# Altium PCB PCB recrea.PcbDoc
Units mm, origin at the board's own origin, x right, y up, seen from the top; angles counter-clockwise.
Board outline 98.78 x 23.62 mm, 2 copper layers (Top Layer, Bottom Layer); 52 components, 41 nets, 192 pads, 28 vias.
Unrouted connection lines stored in the file: 4.
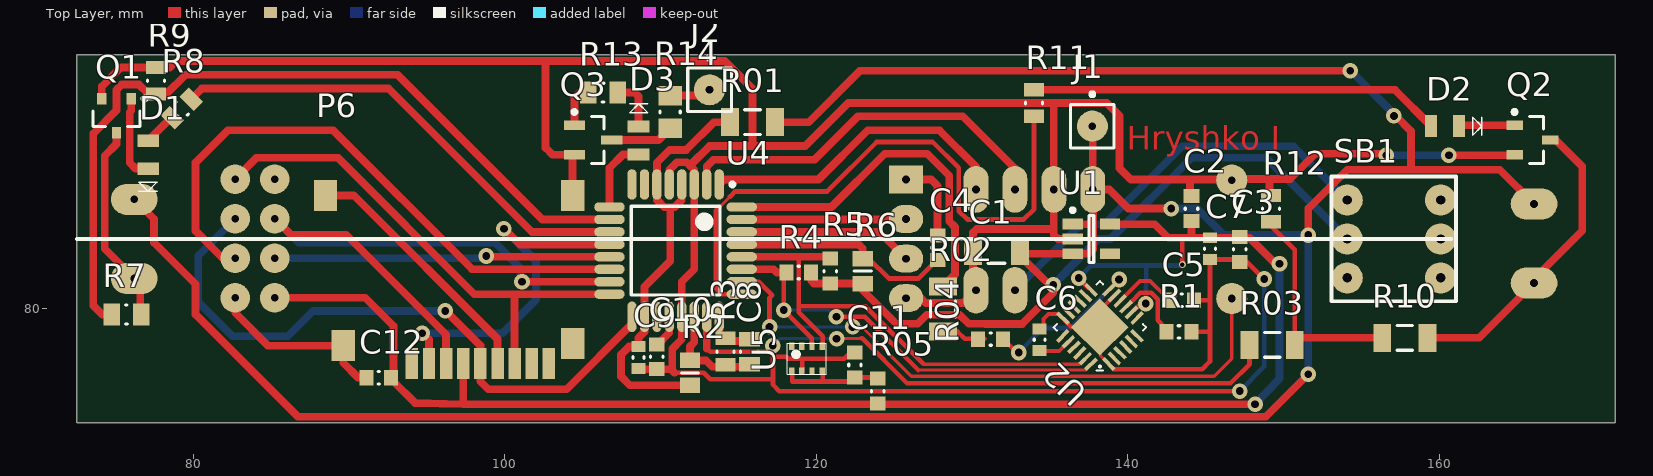
[diagram p0: Top Layer view]
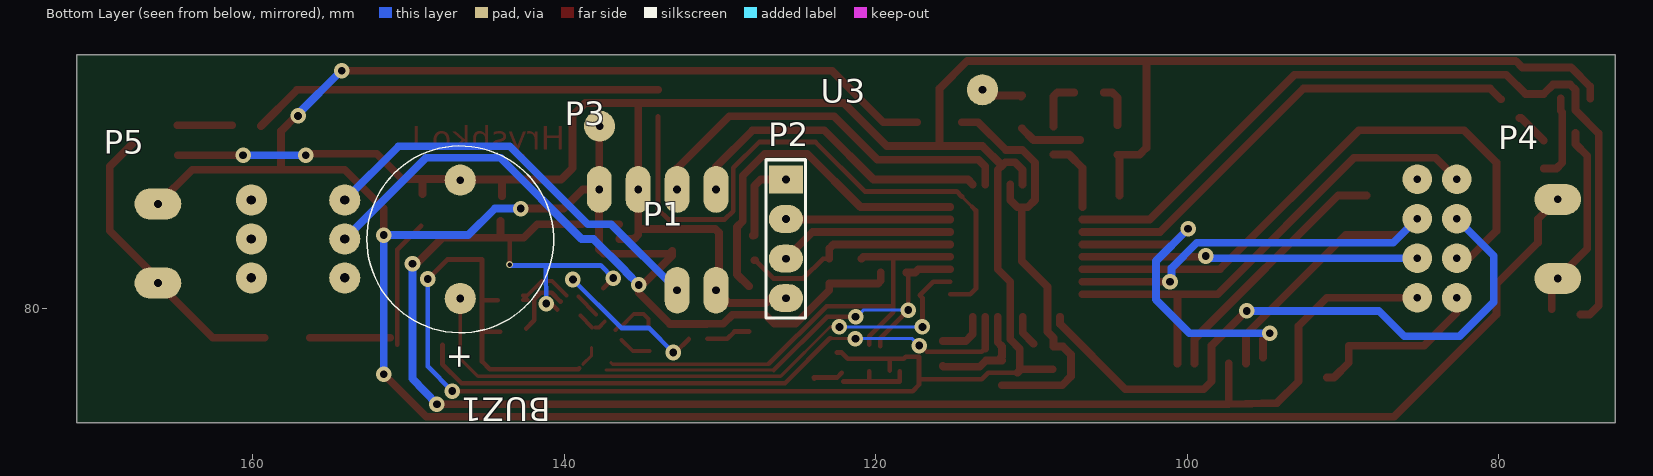
[diagram p1: Bottom Layer view, seen from below]
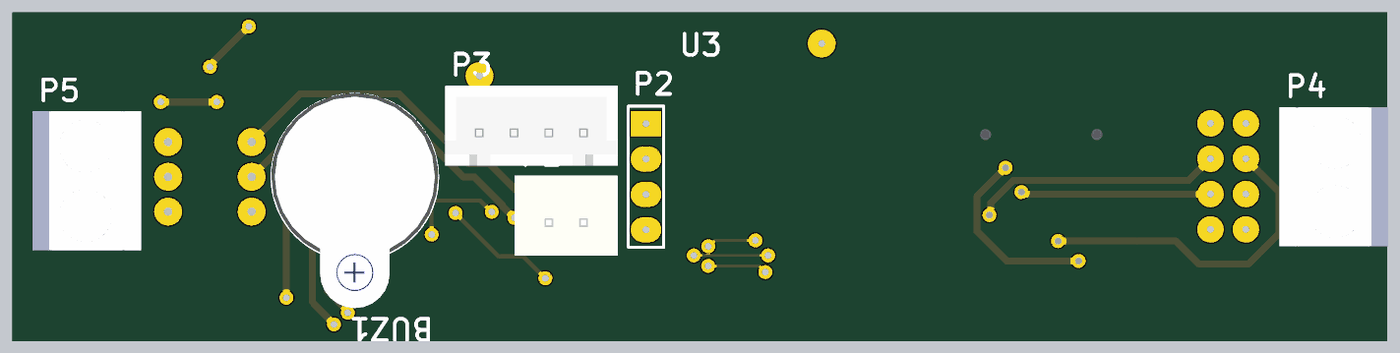
[diagram p2: 3D render of the assembled board from below, using the file's embedded part models]

## Layer stack, top to bottom
Top Layer: signal copper 0.0356
Dielectric 1: dielectric 0.32, FR-4, Dk 4.8
Bottom Layer: signal copper 0.0356

## Board outline
72.517,72.644 171.3,72.644 171.3,96.266 72.517,96.266

## Design rules (kind name [scope] priority, off if disabled: settings)
Clearance [All] p1: gap=0.15 ignorepadtopadclearanceinfootprint=TRUE except(0: Arc-SMDPad Arc-THPad Arc-Via Arc-Fill Arc-Poly Arc-Region Arc-Text Arc-Hole Track-SMDPad Track-THPad Track-Via Track-Fill Track-Poly Track-Region Track-Text Track-Hole)
ComponentClearance [All] p1: gap=0.5 collisioncheckmode=3 verticalgap=0 showdistances=TRUE
HoleSize [All] p1: absolutevalues=TRUE maxlimit=2.54 minlimit=0.3 maxpercent=80.000 minpercent=20.000
PolygonConnect [All] p1: connectstyle=Relief reliefconductorwidth=0.254 reliefentries=4 polygonreliefangle="90 Angle" airgapwidth=0.254
RoutingVias [All] p1: holewidth=0.711 width=1.27 viastyle="Through Hole" minholewidth=0.3 minwidth=0.46 maxholewidth=0.711 maxwidth=1.27
ShortCircuit [All] p1: allowed=TRUE
SolderMaskExpansion [All] p1: expansion=0.102
Width [All] p1: maxlimit=0.7 minlimit=0.2 preferedwidth=0.5
27 further rules are at their usual default settings.

## Classes and differential pairs
component class Shematic: BUZ1 C1 C2 C3 C4 C5 C6 C7 C8 C9 C10 C11 C12 D1 D2 D3 J1 J2 P1 P2 P3 P4 P5 P6 Q1 Q2 Q3 R1 R2 R3 R4 R5 R6 R7 R8 R9 R10 R11 R12 R13 R14 SB1 U1 U2 U3 U4 U5

## Components (designator, comment, footprint, x,y, rotation, side; value= is the part's Value field where it differs from the comment)
BUZ1 "Buzzer" BUZ12X7,6MM 146.685,88.265 r270 bottom value=KPX-1203B
C1 "10uF" CAPC1206(3216)190_N 131.572,83.687 r0 top
C2 "4.7uF" CAPC0603(1608)100_N 144.1,86.4 r270 top
C3 "100nF" CAPC0603(1608)100_N 147.2,83.778 r270 top
C4 "100nF" CAPC0603(1608)100_N 127.791,83.885 r90 top
C5 "100nF" CAPC0603(1608)100_N 143.472,80.518 r180 top
C6 "2.2nF" CAPC0603(1608)100_L 134.35,77.975 r270 top
C7 "10nF" CAPC0603(1608)100_L 145.288,83.828 r90 top
C8 "100pF" CAPC0805(2012)100_L 115.697,77.207 r270 top value=200pF
C9 "1uF" CAPC0603(1608)100_L 108.577,76.835 r90 top
C10 "100nF" CAPC0603(1608)100_N 109.763,76.884 r90 top
C11 "100nF" CAPC0603(1608)100_N 122.483,76.352 r270 top
C12 "4.7uF" CAPC0603(1608)100_N 91.9,75.526 r0 top
D1 "" LED0805 77.089,90.551 r270 top
D2 "" LED0805 159.7,91.7 r0 top
D3 "" LED0805 108.585,90.094 r90 top
J1 "" PIN1 137.73,91.694 r0 top
J2 "" PIN1 113.147,94.029 r0 top
P1 "XH-2" XH-2 134.755,82.657 r0 bottom
P2 "" HDR1X4 125.77,88.265 r270 bottom
P3 "XH-4" XH-4 133.255,86.13 r180 bottom
P4 "screw-con-2" screw-con-2 76.2,81.915 r90 bottom locked
P5 "screw-con-2" screw-con-2 166.1,86.7 r270 bottom
P6 "microSD" "Micro SD holder" 102.827,76.454 r180 top
Q1 "MMBT2222A" INF-SOT23_L 75.057,92.363 r270 top
Q2 "MMBT2222A" INF-SOT23_N 166,90.805 r0 top
Q3 "MMBT2222A" INF-SOT23_M 105.664,90.805 r0 top
R1 "4K7" RESC0603(1608)_N 143.3,78.479 r0 top value="4700.00 Ohm"
R01 "1K" RESC1206(3216)_N 115.901,91.948 r180 top value="1000.00 Ohm"
R2 "39K" 6-0805_L 111.891,75.852 r270 top value="39000.00 Ohm"
R02 "1K" RESC1206(3216)_N 128.143,79.957 r270 top value="1000.00 Ohm"
R3 "13K" RESC0805(2012)_L 114.173,77.216 r90 top value="13000.00 Ohm"
R03 "1K" RESC1206(3216)_N 149.278,77.651 r0 top value="1000.00 Ohm"
R4 "4K7" RESC0603(1608)_N 118.872,82.296 r0 top value="4700.00 Ohm"
R04 "4K7" RESC0603(1608)_N 131.2,78.021 r0 top value="4700.00 Ohm"
R5 "4K7" RESC0603(1608)_N 120.904,82.385 r270 top value="4700.00 Ohm"
R05 "4K7" RESC0603(1608)_N 123.952,74.676 r270 top value="4700.00 Ohm"
R6 "10K" 6-0805_L 122.983,82.385 r270 top value="10000.00 Ohm"
R7 "1K" RESC0805(2012)_N 75.692,79.596 r0 top value="1000.00 Ohm"
R8 "82R" RESC0805(2012)_L 79.248,92.823 r225 top
R9 "10K" RESC0805(2012)_L 77.597,94.615 r270 top value="10000.00 Ohm"
R10 "1K" RESC1206(3216)_N 157.8,78.1 r0 top value="1000.00 Ohm"
R11 "82R" RESC0805(2012)_L 133.985,93.179 r90 top
R12 "10K" RESC0805(2012)_L 149.2,86.398 r270 top value="10000.00 Ohm"
R13 "47R" RESC0805(2012)_N 106.299,93.853 r180 top
R14 "5.6 Ohm" RESC0805(2012)_M 110.613,92.605 r90 top
SB1 "Button" Button 157.1,84.449 r0 top
U1 "MIC5205" SOT23-5L_M 137.668,84.449 r0 top
U2 "MPU-6050" QFN-24-4MM2 138.213,78.771 r135 top
U3 "nrf24l01" "NRF24l01 ant" 82.677,88.291 r270 bottom locked
U4 "ATmega328P-AU" 32A_M 110.963,83.702 r270 top
U5 "BMP280" BMP280 119.4,76.757 r90 top

## Footprints (in the part's own frame and the unit in brackets; to place one, negate y for a bottom-side part, rotate by r counter-clockwise, add the part's x,y. Pads: shape width x height; smd on the part's side, far side on the other; paste and mask are expansions set on the pad)
6-0805_L [mm] "Chip Resistor, Body 2.0x1.2mm, IPC High Density"
  rect 1x1.3 smd: 1(-0.8,0) 2(0.8,0)
  silkscreen extent 0,-0.55 0,0.55, body extent -1.07,-0.7 1.07,0.7, height 0.7
32A_M [mm] "Thin QFP, 32-Leads, Body 7x7mm, Pitch 0.8mm, IPC Low Density"
  oval 1.95x0.6 smd: 1(-4.25,2.8) 2(-4.25,2) 3(-4.25,1.2) 4(-4.25,0.4) 5(-4.25,-0.4) 6(-4.25,-1.2) 7(-4.25,-2) 8(-4.25,-2.8) 17(4.25,-2.8) 18(4.25,-2) 19(4.25,-1.2) 20(4.25,-0.4) 21(4.25,0.4) 22(4.25,1.2) 23(4.25,2) 24(4.25,2.8)
  oval 0.6x1.95 smd: 9(-2.8,-4.25) 10(-2,-4.25) 11(-1.2,-4.25) 12(-0.4,-4.25) 13(0.4,-4.25) 14(1.2,-4.25) 15(2,-4.25) 16(2.8,-4.25) 25(2.8,4.25) 26(2,4.25) 27(1.2,4.25) 28(0.4,4.25) 29(-0.4,4.25) 30(-1.2,4.25) 31(-2,4.25) 32(-2.8,4.25)
  silkscreen extent -4.37,-2.85 2.85,3.78, body extent -3.5,-3.5 3.5,3.5, height 1.2
BMP280 [mm]
  rect 0.5x0.35 smd paste-25.4 mask-25.4: 1(0.8,0.975) 2(0.8,0.325) 3(0.8,-0.325) 4(0.8,-0.975) 5(-0.8,-0.975) 6(-0.8,-0.325) 7(-0.8,0.325) 8(-0.8,0.975)
  silkscreen extent -1,-1.25 1,1.25, body extent -1,-1.25 1,1.25, height 1
Button [mm]
  round 2 hole 0.6: 1(-3,2.5) 2(-3,0) 3(-3,-2.5) 4(3,-2.5) 5(3,0) 6(3,2.5)
  silkscreen extent -4,-4 4,4, body extent -4,-4 4,4, height 13
BUZ12X7,6MM [mm]
  round 2 hole 0.5: 1(0.04,0) 2(7.64,0)
  silkscreen extent -2.16,-6 9.84,6, body extent -2.2,-6 13.25,6, height 9.75
CAPC0603(1608)100_L [mm] "Chip Capacitor, Body 1.6x0.8mm, Height 1.0mm, IPC High Density"
  rect 0.7x0.9 smd: 1(-0.7,0) 2(0.7,0)
  silkscreen extent -0.05,-0.35 0.05,0.35, body extent -0.87,-0.47 0.88,0.48, height 1
CAPC0603(1608)100_N [mm] "Chip Capacitor, Body 1.6x0.8mm, Height 1.0mm, IPC Medium Density"
  rect 0.9x1 smd: 1(-0.8,0) 2(0.8,0)
  silkscreen extent -0.05,-0.4 0.05,0.4, body extent -0.88,-0.48 0.87,0.47, height 1
CAPC0805(2012)100_L [mm] "Chip Capacitor, Body 2.0x1.2mm, Height 1.0mm, IPC High Density"
  rect 0.95x1.35 smd: 1(-0.8,0) 2(0.8,0)
  silkscreen extent -0.05,-0.58 0.05,0.58, body extent -1.1,-0.72 1.1,0.72, height 1
CAPC1206(3216)190_N [mm] "Chip Capacitor, Body 3.2x1.6mm, Height 1.9mm, IPC Medium Density"
  rect 1.15x1.8 smd: 1(-1.5,0) 2(1.5,0)
  silkscreen extent -0.55,-0.8 0.55,0.8, body extent -1.7,-0.9 1.7,0.9, height 1.9
HDR1X4 [mm] "Connector; Header; 4 Position"
  rect 1.8x2.2 hole 0.5: 1(0,0)
  oval 1.8x2.2 hole 0.5: 2(2.54,0) 3(5.08,0) 4(7.62,0)
  silkscreen extent -1.27,-1.27 8.89,1.27
INF-SOT23_L [mm] "SOT23, 3-Leads, Body 2.9x1.3 mm, Pitch 0.95 mm, IPC High Density"
  rect 0.75x0.6 smd: 1(-1.1,0.95) 2(-1.1,-0.95) 3(1.1,0)
  silkscreen extent -1.22,-1.5 0.7,1.93, body extent -0.7,-1.5 0.7,1.5, height 1.1
INF-SOT23_M [mm] "SOT23, 3-Leads, Body 2.9x1.3 mm, Pitch 0.95 mm, IPC Low Density"
  rect 1.35x0.6 smd: 1(-1.2,0.95) 2(-1.2,-0.95) 3(1.2,0)
  silkscreen extent -1.32,-1.5 0.7,1.92, body extent -0.7,-1.5 0.7,1.5, height 1.1
INF-SOT23_N [mm] "SOT23, 3-Leads, Body 2.9x1.3 mm, Pitch 0.95 mm, IPC Medium Density"
  rect 1.05x0.6 smd: 1(-1.15,0.95) 2(-1.15,-0.95) 3(1.15,0)
  silkscreen extent -1.27,-1.5 0.7,1.92, body extent -0.7,-1.5 0.7,1.5, height 1.1
LED0805 [mm] "Chip Resistor, Body 2.0x1.2mm, IPC High Density"
  rect 0.8x1.4 smd: 1(-0.219,0.008) 2(1.578,0.008)
  silkscreen extent 2.45,-0.6 3.05,0.57, body extent -0.43,-0.72 1.78,0.72, height 1.4
"Micro SD holder" [mm]
  rect 1.5x2 smd: 0(-1.524,-1.27) 0(-1.524,-10.795) 0(13.208,-1.143) 0(14.351,-10.795)
  rect 0.8x2 smd: 1(8.8,0) 2(7.7,0) 3(6.6,0) 4(5.5,0) 5(4.4,0) 6(3.3,0) 7(2.2,0) 8(1.1,0) 9(0,0)
  body extent -1.65,-15.03 14.66,0.18, height 1.91
"NRF24l01 ant" [mm]
  round 1.9 hole 0.5: 1(7.62,0) 2(7.62,-2.54) 3(5.08,0) 4(5.08,-2.54) 5(2.54,0) 6(2.54,-2.54) 7(0,0) 8(0,-2.54)
  body extent -4.13,-41.13 11.83,2.13, height 2.5
PIN1 [mm] "Connector; Plug"
  round 2 hole 0.5: 1(0,0)
  silkscreen extent -1.4,-1.4 1.4,2.17
QFN-24-4MM2 [mil]
  rect 40x10 smd paste-1000 mask-1000: 1(-81.35,49.48) 2(-81.35,29.51) 3(-81.35,9.74) 4(-81.35,-11.32) 5(-81.35,-31.19) 6(-81.35,-51.05) 13(82.13,-51.05) 14(82.13,-31.19) 15(82.13,-11.32) 16(82.13,9.74) 17(82.13,29.51) 18(82.13,49.48)
  rect 10x40 smd paste-1000 mask-1000: 7(-49.87,-83.53) 8(-30,-83.53) 9(-10.14,-83.53) 10(10.93,-83.53) 11(30.69,-83.53) 12(50.66,-83.53) 19(50.66,81.95) 20(30.69,81.95) 21(10.93,81.95) 22(-10.14,81.95) 23(-30,81.95) 24(-49.87,81.95)
  rect 103x103 smd mask-1000: 18(0.79,-0.39)
  silkscreen extent -83,-83 83,83, body extent -80,-80 80,80, height 35
RESC0603(1608)_N [mm] "Chip Resistor, Body 1.6x0.8mm, IPC Medium Density"
  rect 0.9x1 smd: 1(-0.8,0) 2(0.8,0)
  silkscreen extent -0.05,-0.4 0.05,0.4, body extent -0.85,-0.47 0.85,0.47, height 0.6
RESC0805(2012)_L [mm] "Chip Resistor, Body 2.0x1.3mm, IPC High Density"
  rect 0.85x1.3 smd: 1(-0.85,0) 2(0.85,0)
  silkscreen extent -0.05,-0.55 0.05,0.55, body extent -1.1,-0.67 1.1,0.68, height 0.7
RESC0805(2012)_M [mm] "Chip Resistor, Body 2.0x1.3mm, IPC Low Density"
  rect 1.25x1.5 smd: 1(-1.05,0) 2(1.05,0)
  silkscreen extent -0.05,-0.65 0.05,0.65, body extent -1.1,-0.67 1.1,0.67, height 0.7
RESC0805(2012)_N [mm] "Chip Resistor, Body 2.0x1.3mm, IPC Medium Density"
  rect 1.05x1.4 smd: 1(-0.95,0) 2(0.95,0)
  silkscreen extent -0.05,-0.6 0.05,0.6, body extent -1.1,-0.67 1.1,0.68, height 0.7
RESC1206(3216)_N [mm] "Chip Resistor, Body 3.2x1.6mm, IPC Medium Density"
  rect 1.15x1.8 smd: 1(-1.45,0) 2(1.45,0)
  silkscreen extent -0.5,-0.8 0.5,0.8, body extent -1.67,-0.87 1.67,0.87, height 0.75
screw-con-2 [mm] "2.54"
  oval 2x3 hole 0.5: 1(0,0) 2(5.08,0)
  body extent -2.46,-3.74 7.54,4.06, height 10.2
SOT23-5L_M [mm] "SOT23, 5-Leads, Body 2.9x1.6mm, Pitch 0.95mm, Lead Span 2.8mm, IPC Low Density"
  rect 1.3x0.7 smd: 1(-1.2,0.95) 2(-1.2,0) 3(-1.2,-0.95) 4(1.2,-0.95) 5(1.2,0.95)
  silkscreen extent -1.32,-1.5 0.15,1.97, body extent -0.87,-1.5 0.87,1.5, height 1.45
XH-2 [mm]
  oval 1.6x3 hole 0.5: 1(-4.5,1.5) 2(-2,1.5)
  body extent -6.95,-1.87 0.45,3.88, height 7
XH-4 [mm]
  oval 1.6x3 hole 0.5: 1(-4.5,1.5) 2(-2,1.5) 3(0.5,1.5) 4(3,1.5)
  body extent -6.95,-0.87 5.45,4.88, height 7

## Part data
BUZ1: "BUZ12X7,6MM"
C1: library part CMP-1037-04983-1, "CAP 10uF 50V ±20% 1206 (3216 Metric) Thickness 1.9mm SMD", Case-EIA=1206, Case-Metric=3216, Rated Voltage="50 V", Tolerance=A±20%, Max Thickness="1.9 mm", Technology=SMT
C2 C12: library part CMP-1035-02789-1, "CAP 4.7uF 16V ±20% 0603 (1608 Metric) Thickness 1mm SMD", Case-EIA=0603, Case-Metric=1608, Rated Voltage="16 V", Tolerance=A±20%, Max Thickness="1 mm", Technology=SMT
C3 C4 C5 C10 C11: library part CMP-1035-02585-1, "CAP 100nF 16V ±20% 0603 (1608 Metric) Thickness 1mm SMD", Case-EIA=0603, Case-Metric=1608, Rated Voltage="16 V", Tolerance=A±20%, Max Thickness="1 mm", Technology=SMT
C6: library part CMP-1035-02030-1, "CAP 2.2nF 16V ±20% 0603 (1608 Metric) Thickness 1mm SMD", Case-EIA=0603, Case-Metric=1608, Rated Voltage="16 V", Tolerance=A±20%, Max Thickness="1 mm", Technology=SMT
C7: library part CMP-1035-02312-1, "CAP 10nF 16V ±20% 0603 (1608 Metric) Thickness 1mm SMD", Case-EIA=0603, Case-Metric=1608, Rated Voltage="16 V", Tolerance=A±20%, Max Thickness="1 mm", Technology=SMT
C8: library part CMP-1036-02260-1, "CAP 200pF 16V ±10% 0805 (2012 Metric) Thickness 1mm SMD", Case-EIA=0805, Case-Metric=2012, Rated Voltage="16 V", Tolerance=A±10%, Max Thickness="1 mm", Technology=SMT
C9: library part CMP-1035-02738-1, "CAP 1uF 16V ±20% 0603 (1608 Metric) Thickness 1mm SMD", Case-EIA=0603, Case-Metric=1608, Rated Voltage="16 V", Tolerance=A±20%, Max Thickness="1 mm", Technology=SMT
D1 D2 D3: library part LED0, "Typical INFRARED GaAs LED", LatestRevisionDate=08-Jul-2005, LatestRevisionNote="Mech Layer 1 removed.", PackageDescription="LED; 2 Leads", PackageReference=LED-0, Published=8-Jun-2000, Publisher="Altium Limited"
J1 J2: library part Socket, "Socket", LatestRevisionDate=17-Jul-2002, LatestRevisionNote="Re-released for DXP Platform.", Publisher="Altium Limited"
P1: "XH 2-pin, 2.4mm pitch", LatestRevisionDate=17-Jul-2002, LatestRevisionNote="Re-released for DXP Platform.", Publisher="Altium Limited"
P2: library part "Header 4", "Header, 4-Pin", LatestRevisionDate=17-Jul-2002, LatestRevisionNote="Re-released for DXP Platform.", Publisher="Altium Limited"
P3: "XH 4-pin, 2.4mm pitch", LatestRevisionDate=17-Jul-2002, LatestRevisionNote="Re-released for DXP Platform.", Publisher="Altium Limited"
P4 P5: "screw con 2-pin, 5.08mm pitch", LatestRevisionDate=17-Jul-2002, LatestRevisionNote="Re-released for DXP Platform.", Publisher="Altium Limited"
P6: "microSD holder", LatestRevisionDate=17-Jul-2002, LatestRevisionNote="Re-released for DXP Platform.", Publisher="Altium Limited"
Q1 Q2 Q3: library part CMP-1178-00009-1, "NPN Silicon Switching Transistor, 40 V VCEO, 600 mA IC, SOT23, Reel, Green", Manufacturer=Infineon, ComponentLink1Description="Manufacturer URL", ComponentLink1URL=http://www.infineon.com/, ComponentLink2Description=Datasheet, ComponentLink2URL=http://www.infineon.com/dgdl/smbt2222a_mmbt2222a.pdf?folderId=db3a30431441fb5d011445fab851018e&fileId=db3a30431441fb5d011445fbaff0018f, ComponentLink3Description="Package Specification", ComponentLink3URL=http://www.infineon.com/dgdl/SOT23-Package_Overview.pdf?folderId=db3a30431936bc4b0119532290053c66&fileId=db3a30431936bc4b0119533468123c85, Green=TRUE, IC="150 mA", IC (max)="600 mA", ICBO (max)="10 nA", Mounting Technology="Surface Mount", PackageDescription="3-Pin Small Outline Transistor Package, 1.3 x 2.9 mm Body, 0.95 mm Pitch", PackageReference=SOT23, PackageVersion=Apr-08, Packing=Reel, PartNumber=MMBT2222A, Polarity=NPN, VCBO (max)="75 V", VCE="10 V", VCE (max)="10 V", VCEO (max)="40 V", VEBO (max)="6 V"
R1 R4 R04 R5 R05: library part CMP-1012-00090-1, "4K7 0.1W 5% 0603 (1608 Metric)  SMD", Case-EIA=0603, Case-Metric=1608, Power="0.1 W", Tolerance="5 %", Technology=SMT
R01 R02 R03 R10: library part CMP-1014-00074-1, "1K 0.25W 5% 1206 (3216 Metric)  SMD", Case-EIA=1206, Case-Metric=3216, Power="0.25 W", Tolerance="5 %", Technology=SMT
R2: library part CMP-1014-00112-1, "39K 0.25W 5% 1206 (3216 Metric)  SMD", Case-EIA=1206, Case-Metric=3216, Power="0.25 W", Tolerance="5 %", Technology=SMT
R3: library part CMP-1013-00101-1, "13K 0.125W 5% 0805 (2012 Metric)  SMD", Case-EIA=0805, Case-Metric=2012, Power="0.125 W", Tolerance="5 %", Technology=SMT
R6: library part CMP-1014-00098-1, Case-EIA=1206, Case-Metric=3216, Power="0.25 W", Tolerance="5 %", Technology=SMT
R7: library part CMP-1013-00074-1, "1K 0.125W 5% 0805 (2012 Metric)  SMD", Case-EIA=0805, Case-Metric=2012, Power="0.125 W", Tolerance="5 %", Technology=SMT
R8 R11: library part CMP-1013-00011-1, "2R4 0.125W 5% 0805 (2012 Metric)  SMD", Case-EIA=0805, Case-Metric=2012, Power="0.125 W", Tolerance="5 %", Technology=SMT
R9 R12: library part CMP-1013-00098-1, "10K 0.125W 5% 0805 (2012 Metric)  SMD", Case-EIA=0805, Case-Metric=2012, Power="0.125 W", Tolerance="5 %", Technology=SMT
R13: library part CMP-1013-00060-1, "270R 0.125W 5% 0805 (2012 Metric)  SMD", Case-EIA=0805, Case-Metric=2012, Power="0.125 W", Tolerance="5 %", Technology=SMT
R14: library part CMP-1013-00050-1, "100R 0.125W 5% 0805 (2012 Metric)  SMD", Case-EIA=0805, Case-Metric=2012, Power="0.125 W", Tolerance="5 %", Technology=SMT
U1: "LDO (KB33)"
U3: library part NRF24L01, "Wirless module 2.4GHz"
U4: library part CMP-0095-00269-2, "8-bit AVR Microcontroller, 32KB Flash, 1KB EEPROM, 2KB SRAM, 32-pin TQFP, Industrial Grade (-40°C to 85°C)", Code_JEDEC=MS-026-ABA, ComponentLink1Description="Manufacturer URL", ComponentLink1URL=http://www.atmel.com/, ComponentLink2Description="ATmega48A/48PA/88A/88PA/168A/168PA/328/328P Datasheet", ComponentLink2URL=http://www.atmel.com/dyn/resources/prod_documents/doc8271.pdf, ComponentLink3Description="ATmega48A/48PA/88A/88PA/168A/168PA/328/328P Summary", ComponentLink3URL=http://www.atmel.com/dyn/resources/prod_documents/8271S.pdf, DatasheetVersion="revD, May-2011", PackageDescription="32-Lead, 7x7x1.0 mm Body, 0.8mm Lead Pitch, Thin Profile Plastic Quad Flat Package (TQFP)", PackageReference=32A, PackageVersion="revC, Oct-2010", RevisionNote="DatasheetVersion & PackageVersion updated. URLs added."

## Via types
v1: diameter 1, hole 0.5, Top Layer to Bottom Layer, 27 vias
v2: diameter 0.46, hole 0.3, Top Layer to Bottom Layer, 1 vias

## Nets (pads, with @x,y where several pads share a name; then routed paths per layer and width w, separated by ;. In a path a pad name is that pad's centre, name@x,y a point inside that pad or via, vN(x,y) a via of type N, cw(c..) or ccw(c..) an arc to the next point about the centre after c; other vN are vias at no path point)
3.3V: C2.2 C3.1 C7.2 C11.2 C12.2 P6.4 R05.1 R05.2 U1.5 U2.8 U2.13 U3.2 U5.5 U5.8 | length 113.1
  Top Layer w0.3: U5.8@118.461,75.957 118.461,75.298 C11.2@122.094,75.298 ; 120.411,75.298 U5.5@120.411,75.957 ; C11.2@122.183,75.852 C11.2 R05.1@123.989,75.552 ; R05.1@123.876,75.552 R05.1 ; v1(136.851,81.937) U2.13@137.509,81.279 ; U2.8@140.449,79.92 140.731,80.202 141.2,80.202 ; v2(143.51,82.8) 143.51,84.528
  Top Layer w0.5: U3.2 91.033,80.671 92.837,78.867 92.837,75.311 94.234,73.914 97.327,73.84 ; P6.4 97.327,73.84 ; U1.5 140.892,85.399 141.739,85.399 142.61,84.528 143.51,84.528 144.1,84.528 ; C2.2 144.1,84.528 ; v1(148.186,73.84) 97.327,73.84 ; v1(149.75,82.86) 149.496,82.86 147.828,84.528 C7.2 144.1,84.528
  Bottom Layer w0.3: v1(136.851,81.937) 137.664,82.75 143.46,82.75 v2(143.51,82.8) ; 141.164,80.203 141.2,82.691
  Bottom Layer w0.5: v1(148.186,73.84) 149.75,75.478 v1(149.75,82.86)
adc: C8.2 R2.1 R3.1 U4.22 | length 7
  Top Layer w0.5: R2.1 R2.1@112.141,76.652 ; U4.22 112.163,77.812 111.891,77.54 111.891,76.902 R2.1@112.141,76.652 ; C8.2@115.697,76.289 115.647,76.239 113.322,76.239 112.909,76.652 R2.1@112.141,76.652
adc_en: C8.1 R3.2 U4.24 | length 3.2
  Top Layer w0.5: U4.24 113.763,78.349 114.223,77.889 C8.1@115.697,77.889
BATT+: C1.2 C9.2 J1.1 P3.1 P4.1 P5.1 R01.1 R01.2 R2.2 R4.2 R5.2 R6.2 SB1.2 U1.1 U1.3 U4.4 U4.6 U4.18 | length 262.2
  Top Layer w0.3: 139.992,86.449 140.043,86.398
  Top Layer w0.5: 76.2,86.995 77.47,85.725 77.47,84.201 80.137,81.534 80.137,79.596 86.708,73.025 148.868,73.025 v1(151.6,75.757) ; U4.4 111.353,87.952 111.353,86.95 110.89,86.487 110.619,86.487 ; R2.2 108.028,75.052 107.463,75.617 107.463,77.027 107.971,77.535 C9.2 108.577,78.097 108.963,78.483 U4.18 108.963,81.379 110.619,83.035 110.619,86.487 ; R01.2 113.433,91.948 111.655,90.17 110.589,90.17 109.763,89.344 U4.6 109.773,87.942 109.773,86.95 110.236,86.487 110.619,86.487 ; R01.1 119.507,91.948 122.809,95.25 v1(154.3,95.25) ; R4.2 119.672,81.762 119.849,81.585 R5.2 R6.2 122.983,81.16 125.14,79.002 126.509,79.002 127.092,79.585 129.203,79.585 129.786,79.002 130.862,79.002 130.856,78.996 133.225,78.996 135.219,80.99 v1(135.219,81.5) 134.957,81.5 133.072,83.385 C1.2 133.26,83.499 U1.3 137.474,83.499 137.768,83.793 137.768,85.939 137.772,85.939 137.772,87.613 P3.1 ; U1.1 137.683,85.399 ; J1.1 137.755,91.669 P3.1 ; 139.992,86.449 138.811,87.63 P3.1 ; 140.043,86.4 v1(142.8,86.4) ; v1(151.6,84.7) 151.6,86.398 151.593,86.398 154.096,88.901 163.899,88.901 P5.1 ; v1(157.1,92.356) 157.222,92.356 158.2,91.378 158.2,88.901
  Bottom Layer w0.5: v1(135.219,81.5) 136.075,82.356 136.075,82.391 138.133,84.449 138.893,84.449 144.106,89.662 148.887,89.662 SB1.2 ; v1(142.8,86.4) 144.472,86.4 146.172,84.7 v1(151.6,84.7) v1(151.6,75.757) ; v1(154.3,95.25) 154.328,95.25 157.1,92.478 v1(157.1,92.356)
buzzer: BUZ1.2 U4.26 | length 40
  Top Layer w0.2: v1(122.333,78.8) 122.94,78.8 126.106,75.634 145.553,75.634 146.685,76.766 BUZ1.2@146.685,80.665
  Top Layer w0.3: U4.26 116.291,81.702 117.167,80.826 117,80.659 v1(117,78.8) 117,78.774 v1@117.167,78.607
  Bottom Layer w0.2: v1(117,78.8) v1(122.333,78.8)
CAMON: P3.3 U4.2 | length 25
  Top Layer w0.5: U4.2 112.963,89.104 113.394,89.535 119.888,89.535 122.682,92.329 129.413,92.329 132.755,88.987 P3.3
CAMREC: P3.4 U4.1 | length 20.4
  Top Layer w0.5: U4.1 114.076,88.265 120.142,88.265 123.315,91.438 127.908,91.438 130.255,89.091 P3.4
CARDCS: P6.2 U4.12 | length 21.9
  Top Layer w0.5: P6.2@95.125,76.835 95.125,77.996 ; v1@99.951,85.114 100.963,84.102 U4.12
  Bottom Layer w0.5: v1(94.693,78.4) 99.848,78.4 102,80.552 102,83.037 v1(99.937,85.1)
CHECKE: R03.1 R03.2 R10.1 R12.2 U4.23 | length 53.6
  Top Layer w0.2: 116.713,77.216 117.2,77.703 v1(117.2,77.6) ; v1@121.534,78.066 122.891,78.066
  Top Layer w0.3: 112.963,77.406 113.003,77.406 113.194,77.216 116.713,77.216 ; 122.891,78.066 122.942,78.066 125.825,75.184 146.603,75.184 147.828,76.409 R03.1 ; R12.2@149.2,85.298 150.728,83.77 R03.2
  Top Layer w0.5: 112.963,77.406 U4.23 ; R03.2@151.177,78.1 R10.1
  Bottom Layer w0.2: v1(117.2,77.6) 117.646,78.046 v1(121.303,78.046)
CHECKP: R7.1 R9.2 U4.10 | length 52.3
  Top Layer w0.5: R7.1 74.14,79.596 73.557,80.179 73.557,91.214 75.057,92.714 75.057,94.025 75.393,94.361 76.496,94.361 77.092,93.765 R9.2 78.271,93.765 79.502,94.996 93.106,94.996 102.4,85.702 U4.10
DTR: C4.2 P2.1 | length 5.4
  Top Layer w0.5: P2.1 127.381,88.265 127.791,87.855 C4.2 ; C4.2@127.889,84.658 C4.2@127.889,84.685
ENGINE: P5.2 Q2.3 R10.2 | length 19.4
  Top Layer w0.5: R10.2 162.58,78.1 166.273,81.793 166.273,82.06 169.2,84.987 169.2,89.1 Q2.3@167.561,90.739
engine_tr: R11.1 U4.25 | length 39
  Top Layer w0.2: 113.792,86.502 114.463,87.173
  Top Layer w0.3: 113.792,86.502 113.563,86.273 113.563,81.261 113.923,80.902 U4.25 ; 114.463,87.173 114.793,87.503 120.695,87.503 123.87,90.678 127.491,90.678 129.159,89.01 129.159,86.233 129.69,85.702 133.327,85.702 133.985,86.36 R11.1
GND: BUZ1.1 C1.1 C2.1 C3.2 C5.1 C6.1 C7.1 C9.1 C10.1 C11.1 C12.1 P1.1 P2.4 P3.2 P6.0 P6.6 Q1.2 Q2.2 Q3.2 R1.2 R9.1 R12.1 U1.2 U2.1 U2.11 U2.18 U3.1 U4.3 U4.5 U4.21 U5.7 | length 269.5
  Top Layer w0.2: U2.18@138.25,77.472 138.25,76.951 U2.1@138.808,76.393
  Top Layer w0.25: C6.1@134.6,78.85 134.6,79.3 134.925,79.625 135.538,79.625 136.365,78.798 136.534,78.798 U2.18@136.725,78.607 ; U2.18@137.403,79.151 137.783,78.771 U2.18@138.003,78.771 ; U2.18@137.953,79.607 U2.11@139.091,80.745 ; U2.18@138.213,78.771 U2.18@138.973,79.531
  Top Layer w0.3: C9.1 C9.1@108.628,76.084 ; 110.89,75.852 112.78,75.852 113.182,75.45 117.221,75.45 ; U5.7@119.096,76.004 119.096,76.664 ; C11.1 122.177,77.152 121.782,76.757 118.197,76.757 118.073,76.881 117.221,76.881 117.221,75.45 ; U2.1@139.035,76.142 139.093,76.084 144.789,76.084 145.288,76.583 145.288,78.5 ; R1.2@144.121,78.5 145.288,78.5 ; C5.1 145.288,80.518 ; v1(147.193,74.676) 117.631,74.676 117.221,75.086 117.221,75.45 ; v1(148.778,81.876) 147.526,83.128 C7.1 145.288,80.518 ; 145.288,78.5 145.288,80.518
  Top Layer w0.5: Q1.2 74.107,94.234 75.338,95.465 R9.1 78.481,95.465 78.901,95.885 102.616,95.885 ; U3.1 82.677,79.704 84.784,77.597 P6.0@89.617,77.597 ; P6.0@88.476,87.249 90.297,87.249 99.525,78.021 P6.6@99.525,76.454 ; P6.0@89.619,77.597 89.619,76.497 90.564,75.552 C12.1@91.021,75.552 ; P6.0@104.351,87.249 104.351,89.742 Q3.2 103.058,89.855 102.616,90.297 102.616,95.885 ; C9.1@108.628,76.084 C10.1 110.744,76.084 ; U4.5@110.577,87.952 110.577,88.901 111.053,89.377 111.674,89.377 111.887,89.164 ; 110.89,75.852 110.744,75.998 110.744,76.084 ; P2.4 126.724,80.645 127.04,80.329 129.427,80.329 P1.1 130.072,81.34 C1.1 130.072,84.86 130.302,85.09 135.255,85.09 ; U1.2 135.529,84.449 135.255,84.723 135.255,85.09 ; C2.1@144,87.198 144,88.265 ; BUZ1.1@146.685,88.265 140.208,88.265 139.473,89 139.473,92.356 138.651,93.178 135.255,93.178 ; BUZ1.1@146.726,88.306 149.106,88.306 ; R12.1@149.106,87.342 149.106,88.306 ; v1@156.603,89.92 152.055,89.92 150.441,88.306 149.106,88.306 ; v1(160.631,89.829) Q2.2@164.824,89.829 ; 102.616,95.885 114.123,95.885 115.901,94.107 115.901,90.501 115.824,90.424 ; 110.744,76.084 110.744,77.383 111.363,78.002 U4.21 111.363,81.708 112.163,82.508 U4.3 112.163,88.888 111.887,89.164 ; 111.887,89.164 113.147,90.424 115.824,90.424 ; 115.824,90.424 119.293,90.424 122.047,93.178 135.255,93.178 ; 135.255,85.09 P3.2 135.255,93.178
  Bottom Layer w0.3: v1(147.193,74.676) 148.778,76.261 v1(148.778,81.876)
  Bottom Layer w0.5: v1(156.603,89.829) v1(160.631,89.829)
led_tr: D3.1 U4.9 | length 4.7
  Top Layer w0.5: U4.9 106.713,88.999 107.589,89.875 D3.1
MISO: P6.7 U3.7 U4.16 | length 32.7
  Top Layer w0.5: U3.7 84.048,89.662 89.281,89.662 98.041,80.902 100.625,80.902 ; P6.7 100.625,76.456 100.625,80.902 ; U4.16 100.625,80.902
MOSI: P6.3 U3.6 U4.15 | length 40
  Top Layer w0.5: U3.6 86.259,84.709 89.811,84.709 96.225,78.295 96.225,76.456 P6.3 ; v1@100.869,81.702 U4.15
  Bottom Layer w0.5: U3.6 86.766,84.202 99.376,84.202 100.997,82.581 100.997,81.83 100.869,81.702 v1(101.1,81.702)
mpuIRQ: R04.1 R04.2 U2.12 U4.32 | length 36
  Top Layer w0.25: U2.12@139.115,81.479 v1@139.465,81.829
  Top Layer w0.3: 128.143,78.507 129.068,78.507 129.529,78.046 R04.1@130.8,78.046 ; R04.2 v1@132.864,77.157
  Top Layer w0.5: U4.32 120.98,86.502 124.394,89.916 127.127,89.916 128.541,88.502 128.541,85.581 128.905,85.217 128.905,82.169 128.143,81.407 ; v1@132.864,77.157 v1(133,77.157)
  Bottom Layer w0.3: v1(133,77.157) 134.578,78.735 136.335,78.735 v1(139.447,81.847)
NetC5_2: C5.2 U2.10 | length 4.3
  Top Layer w0.25: U2.10@139.866,80.807 140.799,81.74 141.445,81.74 142.378,80.807 142.644,80.807 142.355,80.518 C5.2
NetC6_2: C6.2 U2.20 | length 2.1
  Top Layer w0.25: C6.2@134.535,77.252 135.604,77.252 U2.20@136.325,77.973
NetC10_2: C10.2 U4.20 | length 2
  Top Layer w0.5: C10.2@109.863,77.724 110.563,78.424 U4.20
NetD1_1: D1.1 R8.2 | length 2.2
  Top Layer w0.5: D1.1 78.549,92.222 R8.2
NetD1_2: D1.2 Q1.1 | length 5.5
  Top Layer w0.5: Q1.1 76.007,92.684 75.906,92.583 75.906,89.338 76.271,88.973 D1.2
NetD2_1: D2.1 R11.2 | length 26.5
  Top Layer w0.5: R11.2 157.16,94.029 D2.1
NetD2_2: D2.2 Q2.1 | length 3.5
  Top Layer w0.5: D2.2@161.325,91.755 Q2.1
NetD3_2: D3.2 R13.1 | length 3.4
  Top Layer w0.5: R13.1 108.331,93.853 108.577,93.607 D3.2
NetJ2_1: J2.1 R14.2 | length 2.8
  Top Layer w0.5: R14.2@110.669,93.599 R14.2 112.773,93.655 J2.1
NetP1_2: P1.2 SB1.1 | length 26.6
  Bottom Layer w0.5: P1.2 136.997,85.399 138.501,85.399 143.507,90.405 150.644,90.405 SB1.1
NetQ3_1: Q3.1 R13.2 | length 2.8
  Top Layer w0.5: Q3.1 104.464,93.514 104.803,93.853 R13.2
NetQ3_3: Q3.3 R14.1 | length 4.1
  Top Layer w0.5: Q3.3 109.863,90.805 R14.1
NetR1_1: R1.1 U2.9 | length 4.2
  Top Layer w0.3: U2.9@140.244,80.429 140.816,81 141.5,81 141.93,80.57 141.93,79.22 R1.1@142.45,78.7
NRFCE: U3.3 U4.14 | length 38.8
  Top Layer w0.5: U3.3 81.89,83.211 80.137,84.964 80.137,89.358 82.217,91.438 88.957,91.438 97.893,82.502 U4.14
NRFCS: U3.4 U4.13 | length 21.5
  Top Layer w0.5: v1@98.8,83.302 U4.13
  Bottom Layer w0.5: U3.4 v1@98.8,83.211
  other v1: 98.8,83.353
PARA: P4.2 Q1.3 R7.2 | length 12.6
  Top Layer w0.5: Q1.3 75.057,90.551 74.295,89.789 74.295,83.82 76.2,81.915 76.581,81.534 R7.2@76.581,79.952
para_tr: R8.1 U4.11 | length 31
  Top Layer w0.5: R8.1 80.532,94.107 92.53,94.107 101.735,84.902 U4.11
RESET: C4.1 R6.1 U4.29 | length 14.3
  Top Layer w0.3: R6.1 123.382,83.185 124.652,81.915 126.571,81.915 C4.1@127.741,83.085
  Top Layer w0.5: U4.29 122.709,84.102 122.983,83.828 R6.1 ; C4.1@127.741,83.085 C4.1
RX: P2.3 U4.30 | length 11.7
  Top Layer w0.5: U4.30 124.053,84.902 P2.3 P2.3@125.339,83.185
SCK: P6.5 U3.5 U4.17 | length 41.4
  Top Layer w0.5: v1@96.186,79.844 98.425,77.605 98.425,75.311 98.933,74.803 103.97,74.803 108.163,78.996 U4.17
  Bottom Layer w0.5: U3.5 80.3,83.374 80.3,80.4 82.505,78.195 86.054,78.195 87.689,79.83 v1(96.172,79.83)
SCL: R5.1 U2.23 U4.28 | length 31.7
  Top Layer w0.2: 126.86,76.434 126.894,76.4 136.9,76.4 U2.23@137,76.5
  Top Layer w0.3: 118.872,83.302 118.872,80.137 ; 120.425,77.675 120.425,78.195 118.872,79.748 118.872,80.137 ; 126.86,76.434 123.157,80.137 118.872,80.137
  Top Layer w0.5: U4.28 118.872,83.302 120.787,83.302 R5.1
SDA: R4.1 U2.24 U4.27 U5.3 | length 29.4
  Top Layer w0.2: 126.553,76.034 U2.24@137.325,76.034
  Top Layer w0.3: R4.1 117.904,82.128 117.907,82.125 v1(117.907,79.882) 119.711,78.078 U5.3@119.711,77.565 ; v1@121.295,79.463 123.124,79.463 126.553,76.034
  Top Layer w0.5: U4.27 117.269,82.502 117.475,82.296 R4.1@118.034,82.296
  Bottom Layer w0.2: v1(117.907,79.882) 120.804,79.882 v1@121.252,79.434
  other v1: 121.295,79.455
TX: P2.2 U4.31 | length 10.6
  Top Layer w0.5: U4.31 125.747,85.702 P2.2
pads on no net: P6.1 P6.8 P6.9 R02.1 R02.2 SB1.3 SB1.4 SB1.5 SB1.6 U1.4 U2.2 U2.3 U2.4 U2.5 U2.6 U2.7 U2.14 U2.15 U2.16 U2.17 U2.19 U2.21 U2.22 U3.8 U4.7 U4.8 U4.19 U5.1 U5.2 U5.4 U5.6
copper on no net:
  other v1: 141.166,80.3

## Other copper
Top Layer:
  text "Hryshko I" at 139.954,90.17 h1.52

## Silkscreen, mask and mechanical layers (free items; w line width, h text height)
Top Overlay:
  lines w0.254: 72.517,84.455 160.782,84.449
Mechanical 2:
  the board outline again, w0.254

## Text inside footprints (layer, text, board x,y; h text height)
BUZ1: Bottom Overlay "+" at 147.385,77.765 h1.52 r90